# Altium PCB robothreePCB.PcbDoc
Units mm, origin at the board's own origin, x right, y up, seen from the top; angles counter-clockwise.
Board outline 40 x 50 mm, 4 copper layers (Top Layer, Int1 (GND), Int2 (PWR), Bottom Layer), stack 1.369 mm thick; 67 components, 57 nets, 274 pads, 149 vias.
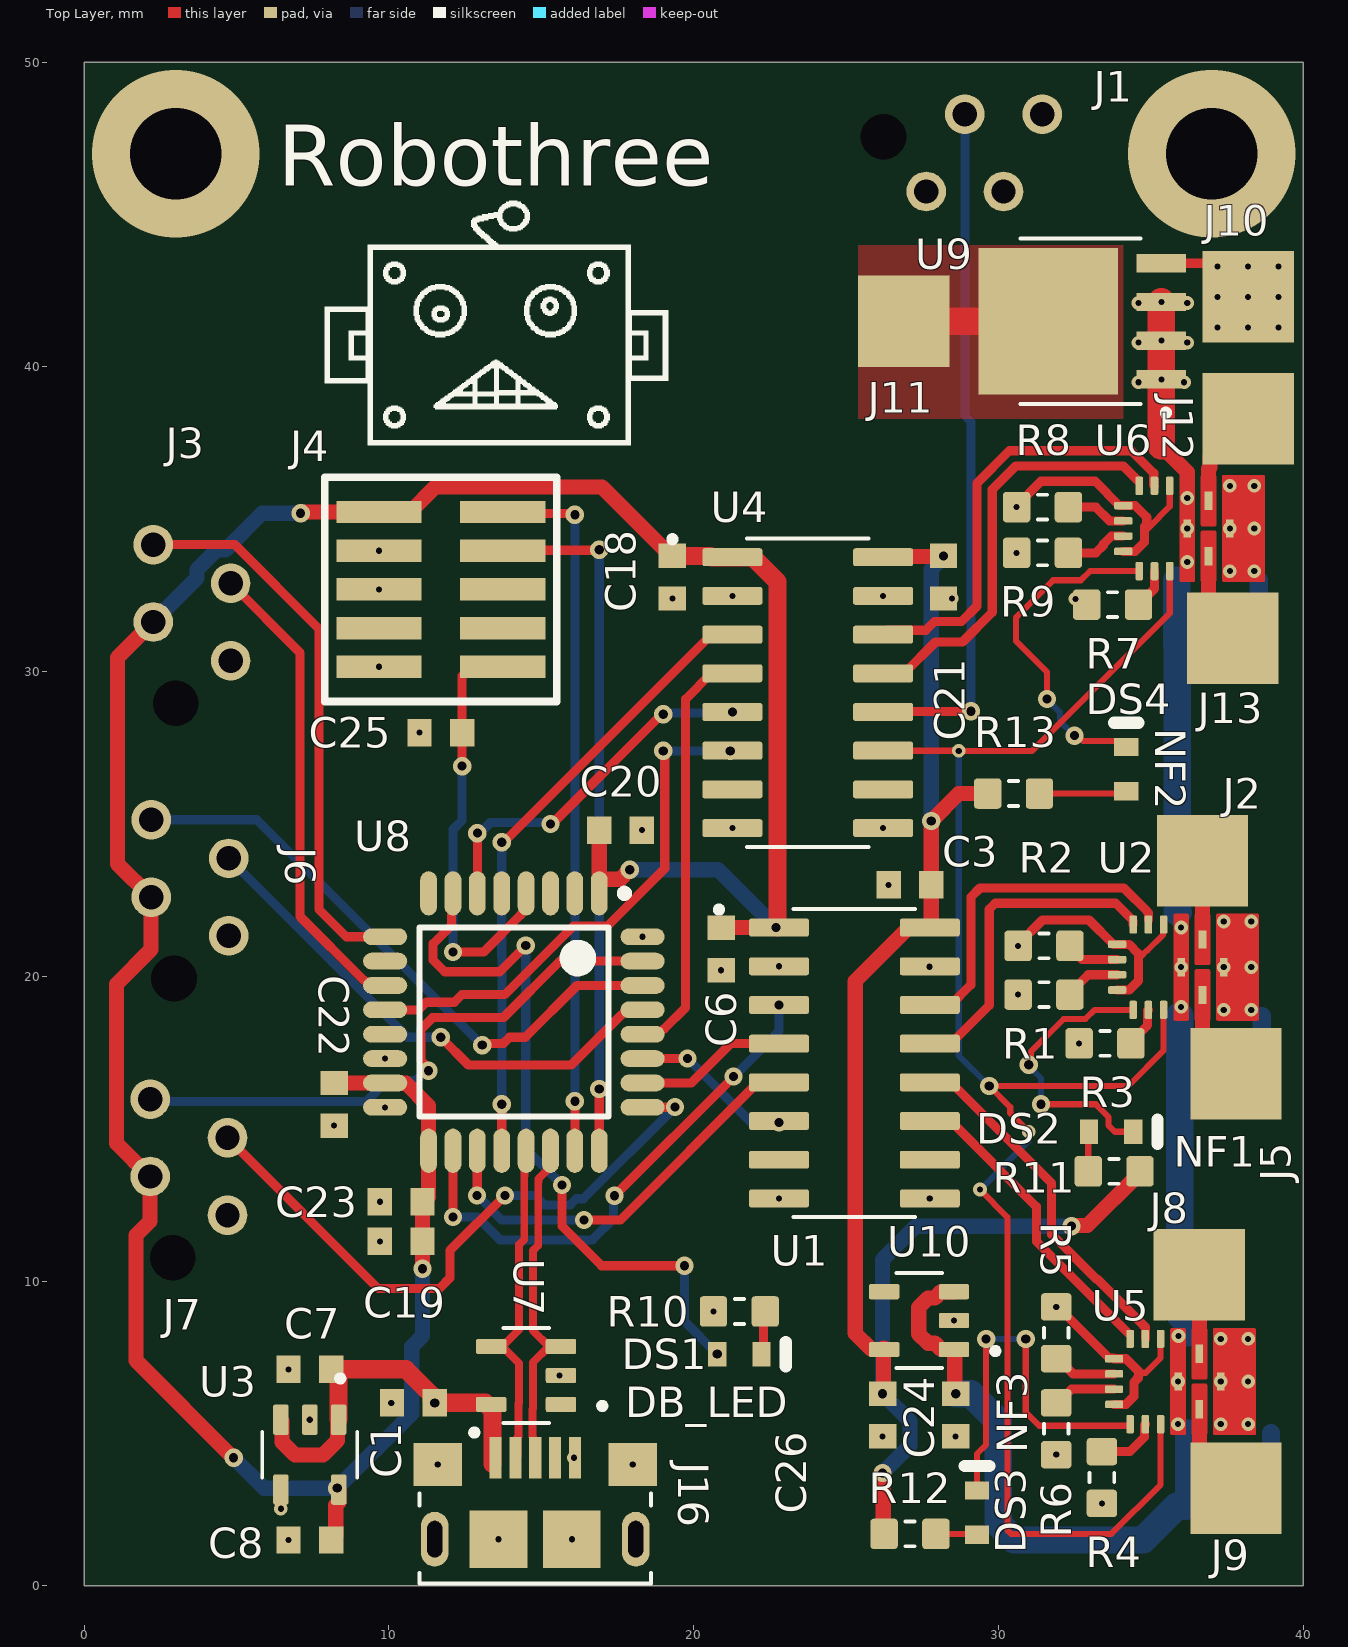
[diagram p0: Top Layer view]
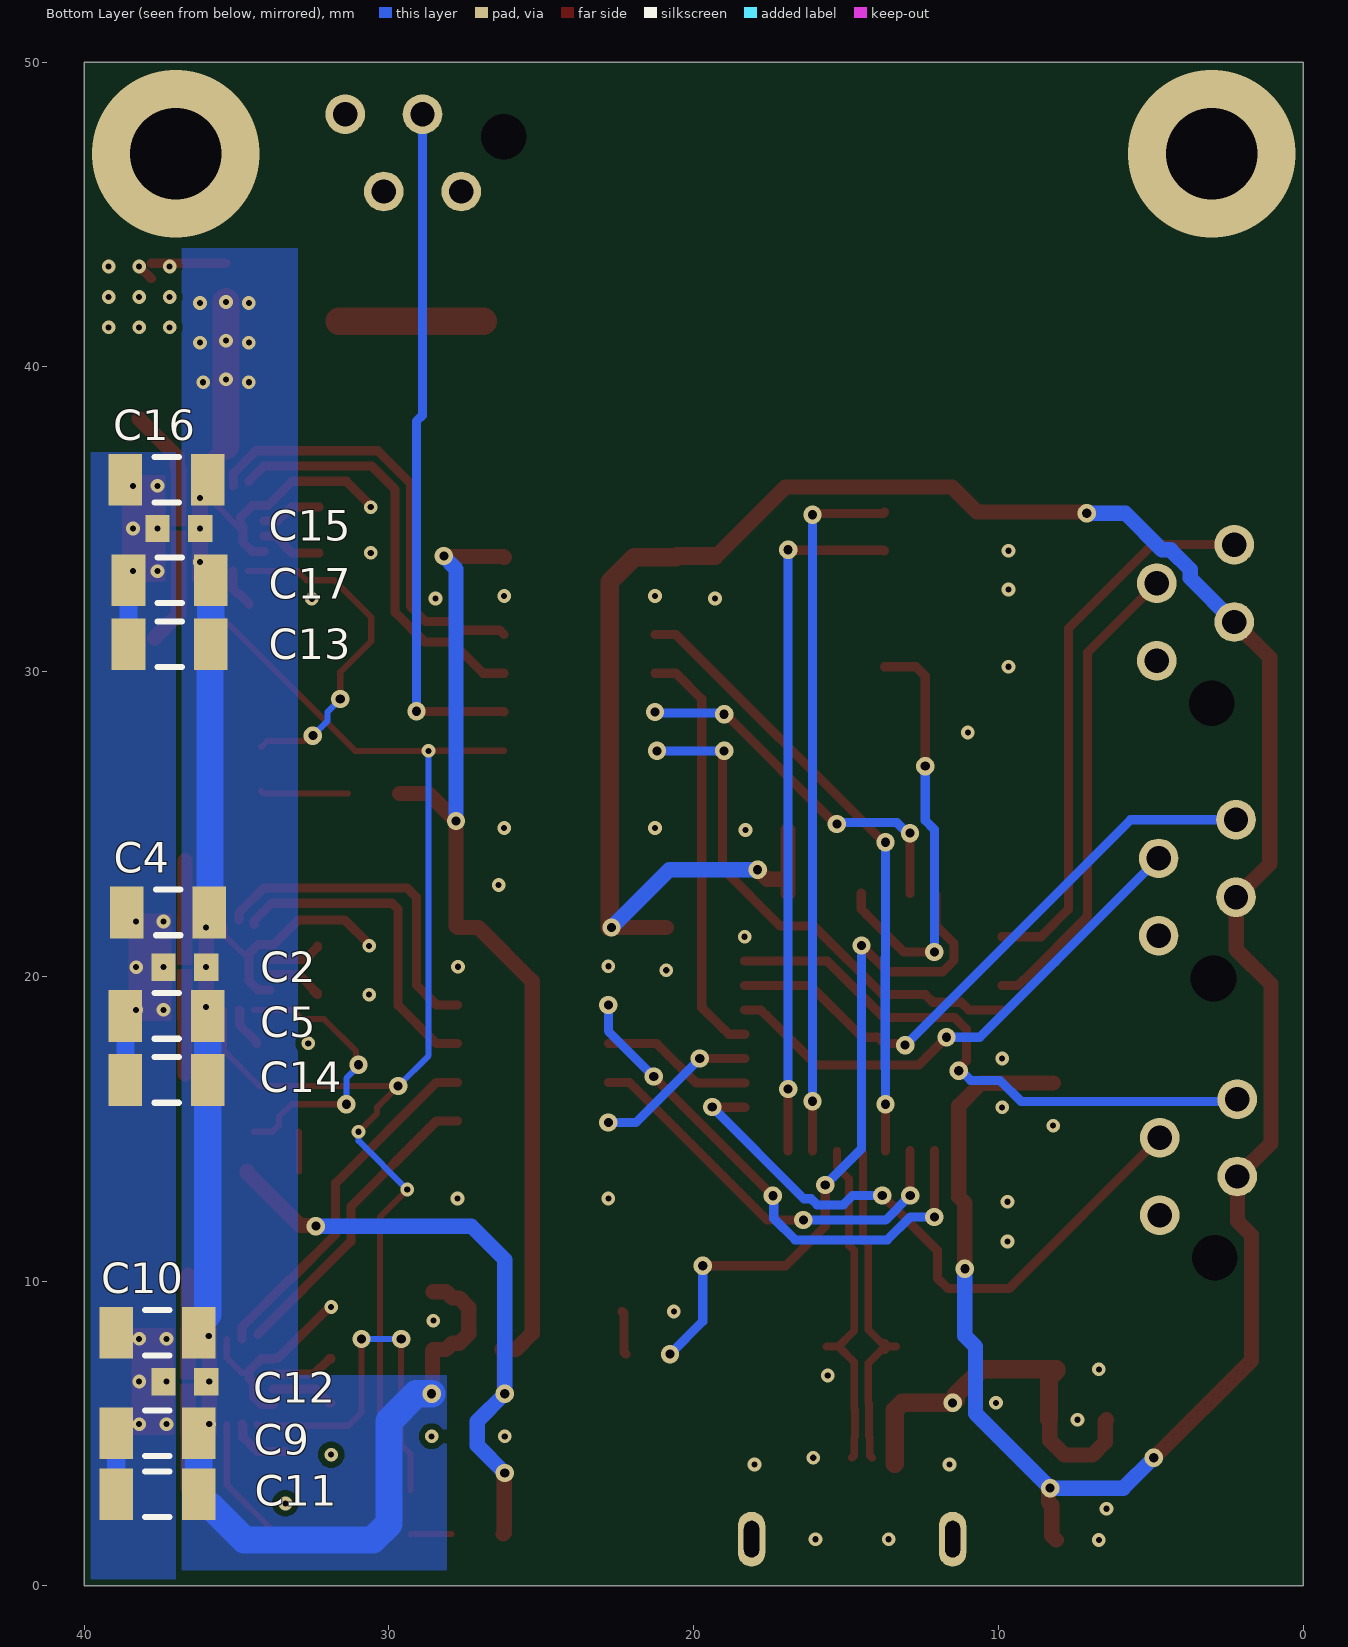
[diagram p1: Bottom Layer view, seen from below]
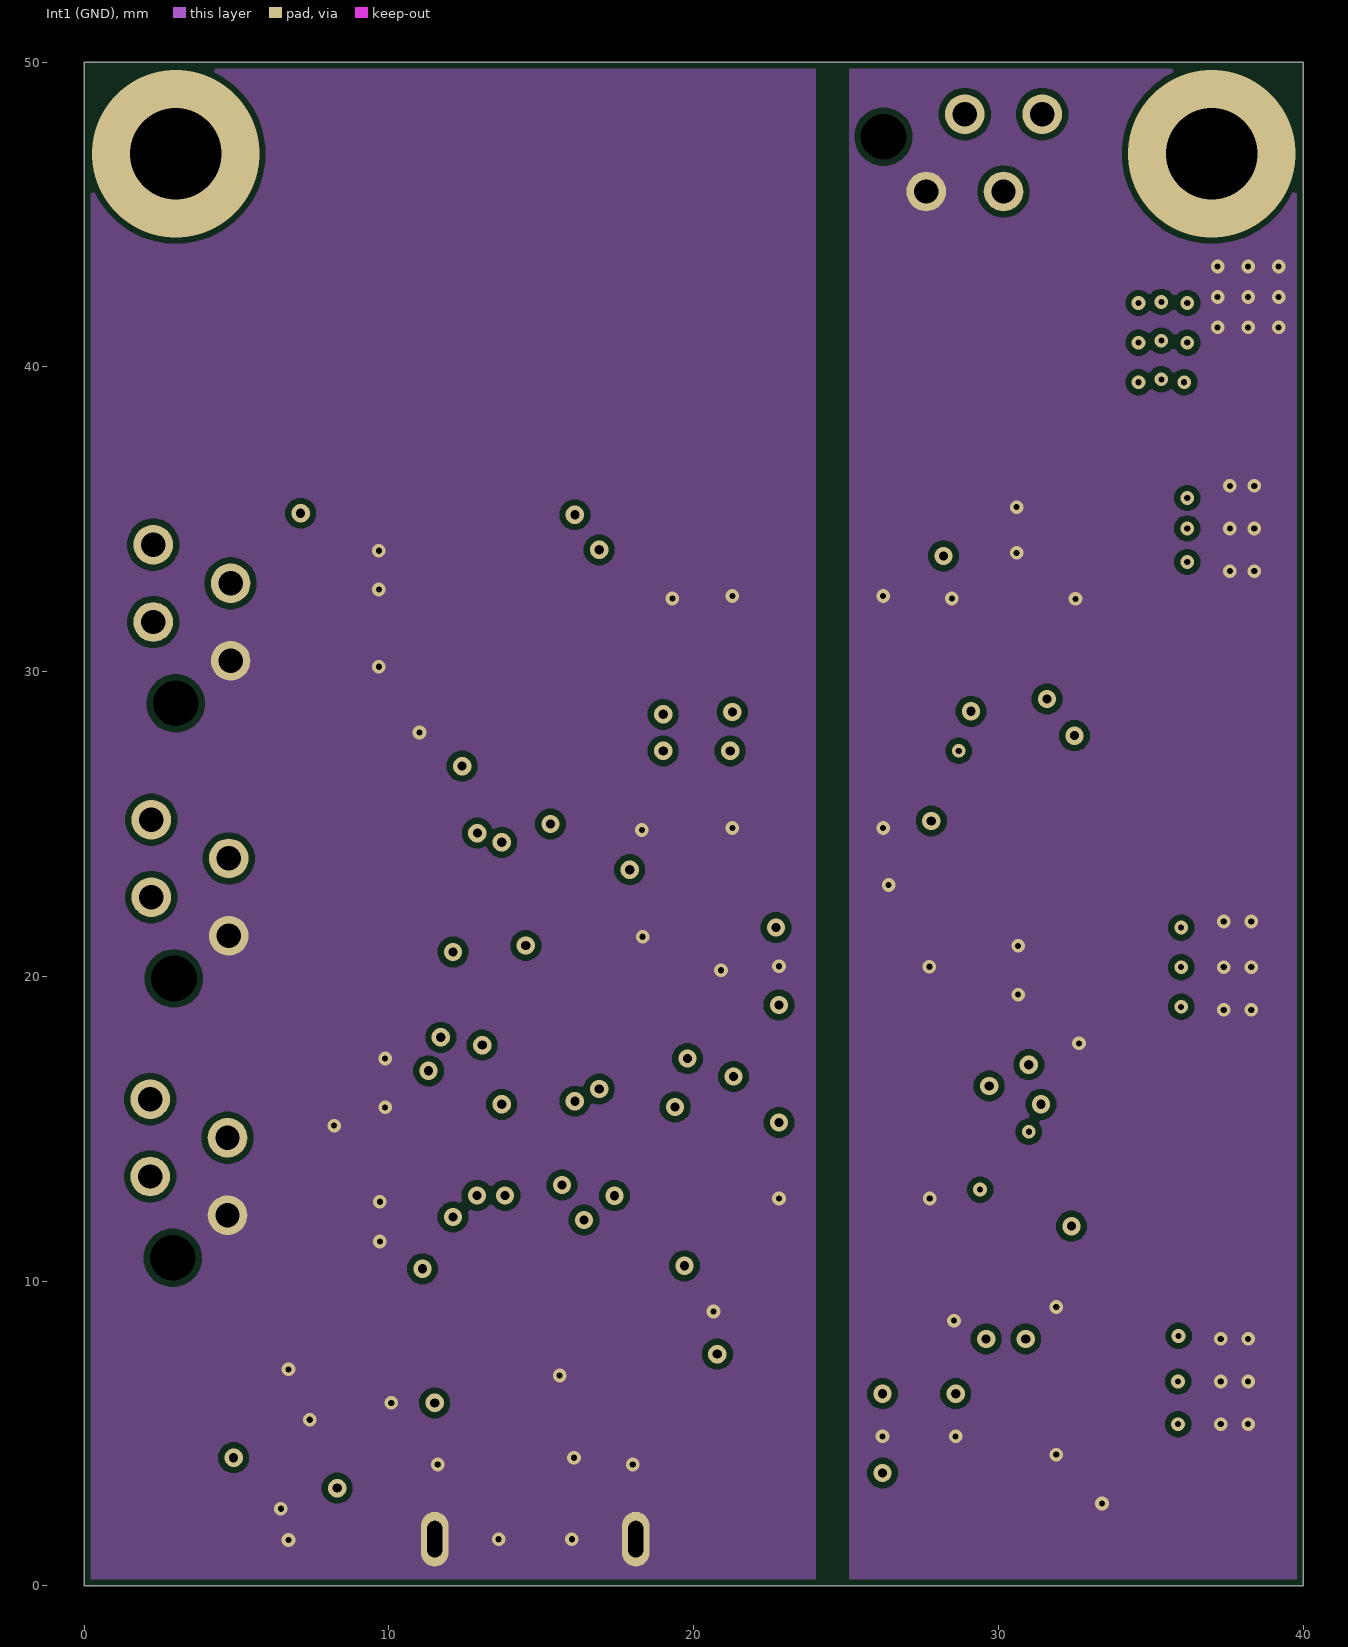
[diagram p2: Int1 (GND)]
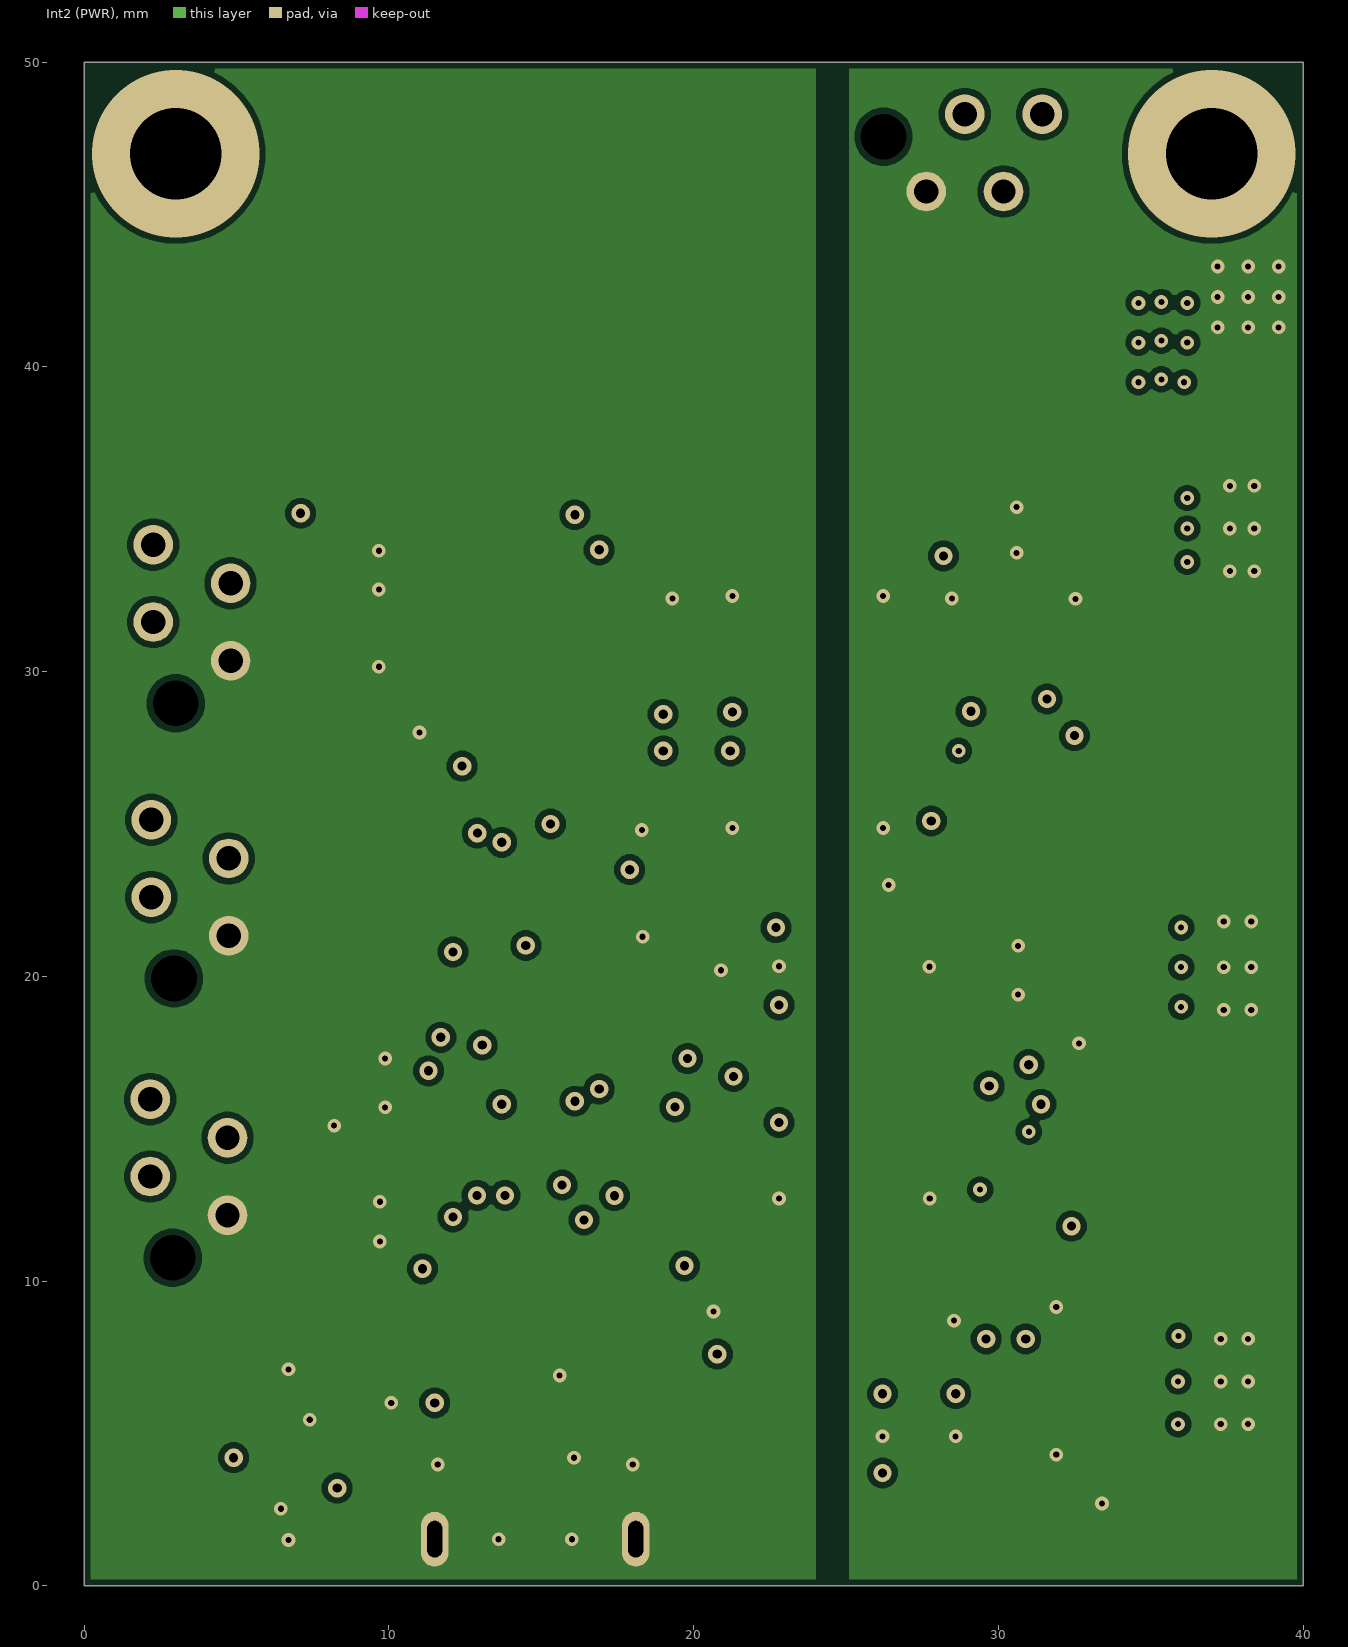
[diagram p3: Int2 (PWR)]
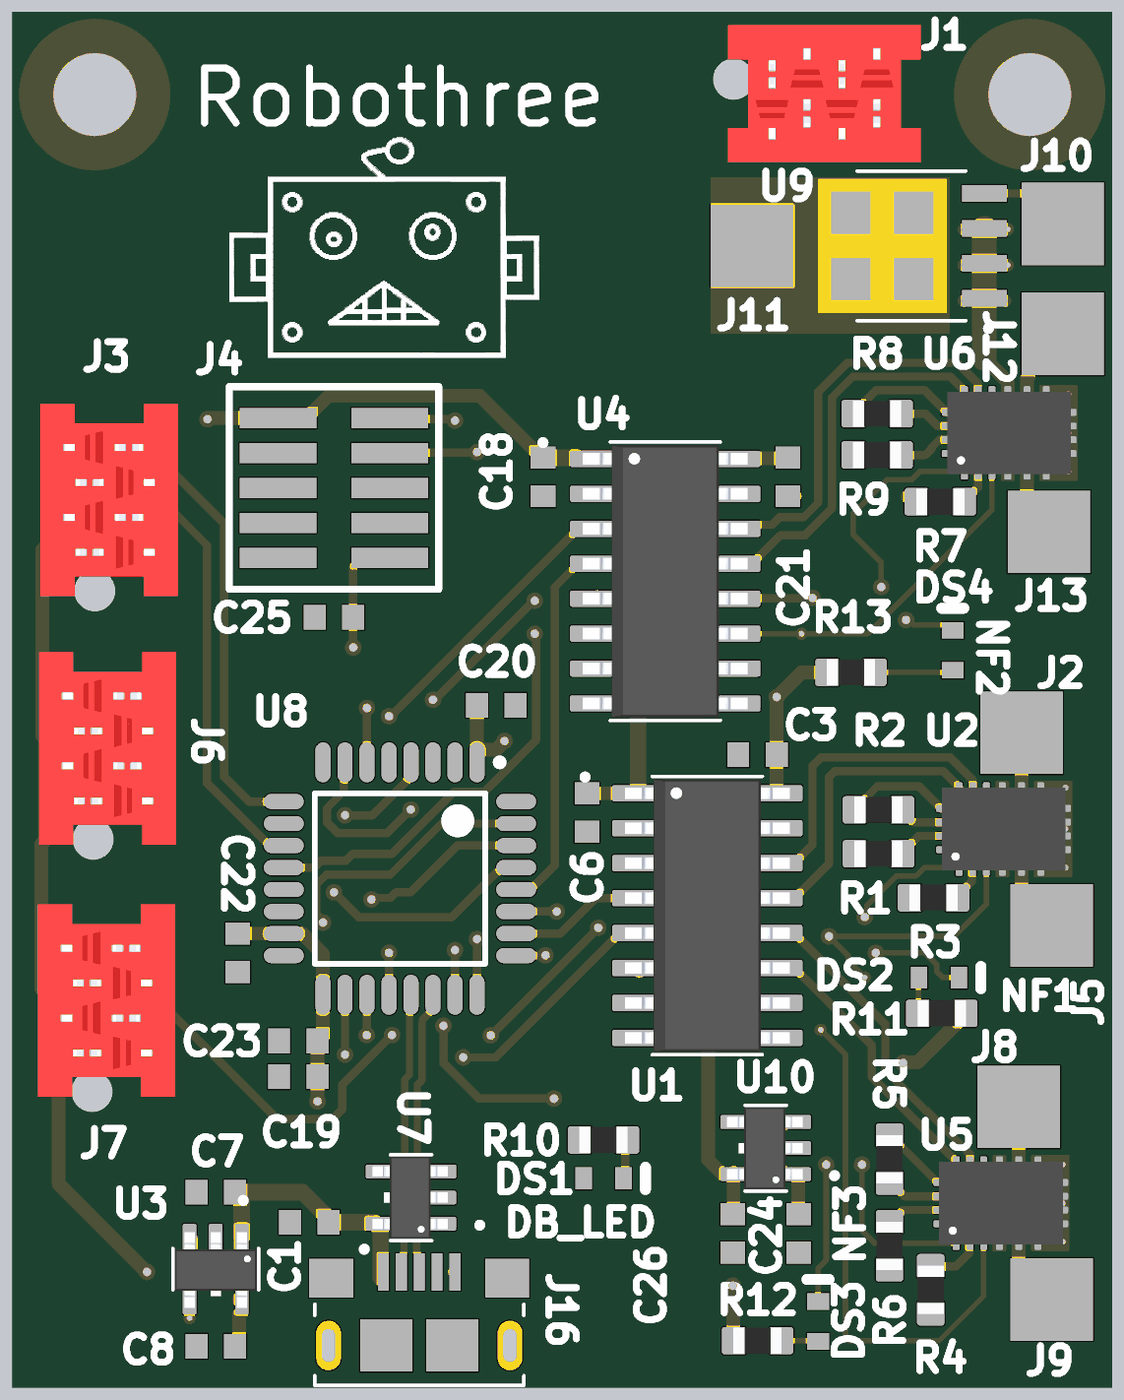
[diagram p4: 3D render of the assembled board from above, using the file's embedded part models]

## Layer stack, top to bottom
Top Solder: solder mask 0.0254, SM-001, Dk 4
Top Layer: signal copper 0.035
Dielectric 1: prepreg 0.1295, PP-017, Dk 4.3
Dielectric 2: prepreg 0.1295, PP-017, Dk 4.3
Int1 (GND): signal copper 0.035
Dielectric 3: core 0.7112, Core-039, Dk 4.8
Int2 (PWR): signal copper 0.035
Dielectric 4: prepreg 0.1295, PP-017, Dk 4.3
Dielectric 5: prepreg 0.1295, PP-017, Dk 4.3
Bottom Layer: signal copper 0.035
Bottom Solder: solder mask 0.0254, SM-001, Dk 4

## Board outline
0,0 0,50 40,50 40,0

## Design rules (kind name [scope] priority, off if disabled: settings)
BoardOutlineClearance [All] p1: gap=0.2 ignorepadtopadclearanceinfootprint=FALSE except(0: Arc-SplitContinuation Track-SplitContinuation SMDPad-SplitContinuation THPad-SplitContinuation Via-SplitContinuation Fill-SplitContinuation Poly-SplitContinuation Region-SplitContinuation Text-SplitContinuation)
Clearance [All] p1: gap=0.2 ignorepadtopadclearanceinfootprint=TRUE except(0: Arc-Hole Track-Hole SMDPad-Hole THPad-Hole Via-Hole Fill-Hole Poly-Hole Region-Hole Text-Hole; 0.14: Poly-Poly Poly-Region Region-Region)
ComponentClearance [All] p1: gap=0.2 collisioncheckmode=3 verticalgap=0.2 showdistances=FALSE
DiffPairsRouting DiffPairsRouting_DIFF90 [InDifferentialPairClass('DIFF90')] p1: maxlimit=0.254 minlimit=0.2 mostfreqgap=0.2 toplayer_minwidth=0.26 toplayer_maxwidth=0.26 toplayer_prefwidth=0.26 midlayer1_minwidth=0.26 midlayer1_maxwidth=0.26 midlayer1_prefwidth=0.26 midlayer2_minwidth=0.26 midlayer2_maxwidth=0.26 midlayer2_prefwidth=0.26 bottomlayer_minwidth=0.26 bottomlayer_maxwidth=0.26 bottomlayer_prefwidth=0.26 maxuncoupledlength=12.7
DiffPairsRouting [All] p2: maxlimit=0.254 minlimit=0.254 mostfreqgap=0.254 toplayer_minwidth=0.381 toplayer_maxwidth=0.381 toplayer_prefwidth=0.381 midlayer1_minwidth=0.381 midlayer1_maxwidth=0.381 midlayer1_prefwidth=0.381 midlayer2_minwidth=0.381 midlayer2_maxwidth=0.381 midlayer2_prefwidth=0.381 bottomlayer_minwidth=0.381 bottomlayer_maxwidth=0.381 bottomlayer_prefwidth=0.381 maxuncoupledlength=12.7
HoleSize [All] p1: absolutevalues=TRUE maxlimit=6.3 minlimit=0.2 maxpercent=80.000 minpercent=20.000
HoleToHoleClearance [All] p1: gap=0.5 allowstackedmicrovias=TRUE
MinimumSolderMaskSliver [All] p1: minsoldermaskwidth=0.2
PlaneClearance [All] p1: clearance=0.2
PlaneConnect [All] p1: planeconnectstyle=Direct reliefexpansion=0.508 reliefentries=4 reliefconductorwidth=0.254 reliefairgap=0.254
PolygonConnect [All] p1: connectstyle=Direct reliefconductorwidth=0.254 reliefentries=4 polygonreliefangle="90 Angle" airgapwidth=0.254
RoutingVias [All] p1: holewidth=0.3 width=0.6 viastyle="Through Hole" minholewidth=0.2 minwidth=0.45 maxholewidth=6.3 maxwidth=10
SilkToSilkClearance [All] p1: silktosilkclearance=0.2
SilkToSolderMaskClearance [IsPad] p1: minsilkscreentomaskgap=0.15 clearancetoexposedcopper=TRUE
SolderMaskExpansion SolderMaskExpansionVIA [isVia] p1: expansion=0.05 istentingtop=TRUE
SolderMaskExpansion [All] p2: expansion=0.05 istentingtop=FALSE
Width [All] p1: maxlimit=5 minlimit=0.2 preferedwidth=0.3
21 further rules are at their usual default settings.

## Classes and differential pairs
differential pair class DIFF90: USB_DATA
differential pair USB_DATA: +USB_DATA_P -USB_DATA_N

## Components (designator, comment, footprint, x,y, rotation, side; value= is the part's Value field where it differs from the comment)
C1 "Cap Semi" 1608[0603] 10.8,6 r0 top value=100nF
C2 "Cap Semi" 1608[0603] 36.7,20.3 r180 bottom value=100nF
C3 "Cap Semi" 1608[0603] 27.1,23 r0 top value=0.1uF
C4 "Cap Semi" C1206 37.25,22.1 r180 bottom value=10uF
C5 "Cap Semi" C1206 37.3,18.7 r180 bottom value=10uF
C6 "Cap Semi" 1608[0603] 20.9,20.9 r90 top value=1uF
C7 "Cap Semi" 1608[0603] 7.4,7.1 r180 top value=1uF
C8 "Cap Semi" 1608[0603] 7.4,1.5 r180 top value=100nF
C9 "Cap Semi" C1206 37.6,5 r180 bottom value=10uF
C10 "Cap Semi" C1206 37.6,8.3 r180 bottom value=10uF
C11 "Cap Semi" C1206 37.6,3 r180 bottom value=10uF
C12 "Cap Semi" 1608[0603] 36.7,6.7 r180 bottom value=100nF
C13 "Cap Semi" C1206 37.2,30.9 r180 bottom value=10uF
C14 "Cap Semi" C1206 37.3,16.6 r180 bottom value=10uF
C15 "Cap Semi" 1608[0603] 36.9,34.7 r180 bottom value=100nF
C16 "Cap Semi" C1206 37.3,36.3 r180 bottom value=10uF
C17 "Cap Semi" C1206 37.2,33 r180 bottom value=10uF
C18 "Cap Semi" 1608[0603] 19.3,33.1 r270 top value=100nF
C19 "Cap Semi" 1608[0603] 10.4,11.3 r0 top value=4.7uF
C20 "Cap Semi" 1608[0603] 17.6,24.8 r180 top value=0.1uF
C21 "Cap Semi" 1608[0603] 28.2,33.1 r90 top value=0.1uF
C22 "Cap Semi" 1608[0603] 8.2,15.8 r90 top value=0.1uF
C23 "Cap Semi" 1608[0603] 10.4,12.6 r0 top value=0.1uF
C24 "Cap Semi" 1608[0603] 28.6,5.6 r270 top value=1uF
C25 "Cap Semi" 1608[0603] 11.7,28 r180 top value=100nF
C26 "Cap Semi" 1608[0603] 26.2,5.6 r90 top value=1uF
DS1 "TLMS1000-GS08" VISH-TLMS1000_V 21.5,7.6 r0 top
DS2 "TLMS1000-GS08" VISH-TLMS1000_V 33.7,14.9 r0 top
DS3 "TLMS1000-GS08" VISH-TLMS1000_V 29.3,2.4 r90 top
DS4 "TLMS1000-GS08" VISH-TLMS1000_V 34.2,26.8 r90 top
J1 "215079-4" MICRO-MATCH-FOB-04 27.63,45.76 r180 top
J2 "Motor Pad" motorPads 36.7,23.8 r0 top
J3 "215079-4" MICRO-MATCH-FOB-04 4.8,30.36 r270 top
J4 "FTSH-105-01-XXX-DV-K" FTSH-105-01-XXX-DV-K 11.7,32.7 r270 top
J5 "Motor Pad" motorPads 37.8,16.8 r0 top
J6 "215079-4" MICRO-MATCH-FOB-04 4.74,21.33 r270 top
J7 "215079-4" MICRO-MATCH-FOB-04 4.7,12.16 r270 top
J8 "Motor Pad" motorPads 36.6,10.2 r0 top
J9 "Motor Pad" motorPads 37.8,3.2 r0 top
J10 "Bat-" motorPads 38.2,42.3 r270 top
J11 "Bat+" motorPads 26.9,41.5 r270 top
J12 "Motor Pad" motorPads 38.2,38.3 r0 top
J13 "Motor Pad" motorPads 37.7,31.1 r0 top
J16 "10118193-0001LF" FCI_10118193-0001LF 14.8,1.525 r0 top
R1 "Thick Film" RESC1608X55N 31.5,19.4 r0 top value=100K
R2 "Thick Film" RESC1608X55N 31.5,21 r0 top value=100K
R3 "Thick Film" RESC1608X55N 33.5,17.8 r180 top value=2K2
R4 "Thick Film" RESC1608X55N 33.4,3.55 r270 top value=2K2
R5 "Thick Film" RESC1608X55N 31.9,8.3 r270 top value=100K
R6 "Thick Film" RESC1608X55N 31.9,5.15 r90 top value=100K
R7 "Thick Film" RESC1608X55N 33.75,32.2 r180 top value=2K2
R8 "Thick Film" RESC1608X55N 31.45,35.4 r0 top value=100K
R9 "Thick Film" RESC1608X55N 31.45,33.9 r0 top value=100K
R10 "Thick Film" RESC1608X55N 21.5,9 r180 top value=4K7
R11 "Thick Film" RESC1608X55N 33.8,13.6 r0 top value=4K7
R12 "Thick Film" RESC1608X55N 27.1,1.7 r180 top value=4K7
R13 "Thick Film" RESC1608X55N 30.5,26 r180 top value=4K7
U1 "MAX14930" SOIC127P600X175-16N 25.275,17.155 r0 top
U2 "DRV8243HRXYQ1" DRV8243_VQFN-HR_14 36.05,20.3 r90 top
U3 "NCP164" SOT95P275X110-5N 7.4,4.301 r270 top
U4 "MAX14930" SOIC127P600X175-16N 23.745,29.311 r0 top
U5 "DRV8243HRXYQ1" DRV8243_VQFN-HR_14 35.95,6.7 r90 top
U6 "DRV8243HRXYQ1" DRV8243_VQFN-HR_14 36.25,34.7 r90 top
U7 "CM1223-02SO" SOT95P275X110-5N 14.5,6.9 r180 top
U8 "STM32G441KB" TQFP80P900X900X160-32N 14.1,18.5 r270 top
U9 "BUK6Y10" TO127P600X120-5N 32.7,41.5 r90 top
U10 "NCV8730" SOT95P275X110-5N 27.4,8.7 r180 top

## Footprints (in the part's own frame and the unit in brackets; to place one, negate y for a bottom-side part, rotate by r counter-clockwise, add the part's x,y. Pads: shape width x height; smd on the part's side, far side on the other; paste and mask are expansions set on the pad)
1608[0603] [mm] "Chip Capacitor, Body 1.6x0.8mm, IPC High Density"
  rect 0.8x0.9 smd: 1(-0.7,0) 2(0.7,0)
  body extent -0.87,-0.48 0.87,0.48, height 1.3
C1206 [mm] "Chip Capacitor, Body 3.2x1.6mm, IPC High Density"
  rect 1.1x1.7 smd: 1(-1.35,0) 2(1.35,0)
  silkscreen extent -0.4,-0.75 0.4,0.75, body extent -1.7,-0.9 1.7,0.9, height 1.3
DRV8243_VQFN-HR_14 [mm]
  rrect40% 0.6x0.25 smd paste+0 mask+0.05: 1(-1.4,1.625) 2(-1.4,1.125) 3(-1.4,0.625) 8(1.4,0.625) 9(1.4,1.125) 10(1.4,1.625)
  rect 0.6x0.25 smd paste-2539.97 mask+0: 4(0,0.05) 5(-0.912,-0.65) 6(0,-1.35) 7(0.912,-0.65)
  rrect40% 0.25x0.6 smd paste+0 mask+0.05: 11(0.75,2.15) 12(0.25,2.15) 13(-0.25,2.15) 14(-0.75,2.15)
  Top Layer region: 0.124,-0.4 1.7,-0.4 1.719,-0.404 1.735,-0.415 1.746,-0.431 1.749,-0.45 1.749,-0.449 1.749,-0.851 1.743,-0.875 1.725,-0.893 1.7,-0.9 1.7,-0.9 0.124,-0.9 0.105,-0.896 0.089,-0.886 0.078,-0.869 0.075,-0.851 0.075,-0.85 0.075,-0.45 0.081,-0.425 0.099,-0.407 0.124,-0.4
  Top Layer region: -1.7,-1.1 1.7,-1.1 1.719,-1.104 1.735,-1.115 1.746,-1.131 1.75,-1.15 1.75,-1.15 1.75,-2.45 1.746,-2.469 1.735,-2.485 1.719,-2.496 1.7,-2.5 1.7,-2.5 -1.7,-2.5 -1.719,-2.496 -1.735,-2.485 -1.746,-2.469 -1.75,-2.45 -1.75,-2.45 -1.75,-1.15 -1.746,-1.131 -1.735,-1.115 -1.719,-1.104 -1.7,-1.1
  Top Layer region: -1.7,-0.4 -0.125,-0.4 -0.106,-0.404 -0.089,-0.415 -0.078,-0.431 -0.075,-0.451 -0.075,-0.45 -0.075,-0.85 -0.078,-0.869 -0.089,-0.885 -0.106,-0.896 -0.125,-0.9 -0.125,-0.9 -1.7,-0.9 -1.719,-0.896 -1.735,-0.886 -1.746,-0.869 -1.75,-0.851 -1.75,-0.85 -1.75,-0.45 -1.743,-0.425 -1.725,-0.407 -1.7,-0.4
  Top Layer region: -1.7,0.3 1.7,0.3 1.719,0.296 1.735,0.285 1.746,0.269 1.75,0.25 1.75,0.25 1.75,-0.15 1.746,-0.169 1.735,-0.185 1.719,-0.196 1.7,-0.2 1.7,-0.2 -1.7,-0.2 -1.719,-0.196 -1.735,-0.185 -1.746,-0.169 -1.75,-0.15 -1.75,-0.15 -1.75,0.25 -1.746,0.269 -1.735,0.285 -1.719,0.296 -1.7,0.3
  body extent -1.5,-2.25 1.5,2.25, height 1
FCI_10118193-0001LF [mm]
  rect 0.4x1.35 smd: 1(-1.3,2.675) 2(-0.65,2.675) 3(0,2.675) 4(0.65,2.675) 5(1.3,2.675)
  rect 1.6x1.4 smd: S1(-3.2,2.45) S2(3.2,2.45)
  rect 1.9x1.9 smd: S3(1.2,0) S4(-1.2,0)
  oval 0.9x1.8 hole 0.5 slot 1.2 at 90 deg: S5(-3.3,0) S6(3.3,0)
  silkscreen extent -3.8,-1.45 3.8,3.6
FTSH-105-01-XXX-DV-K [mil]
  rect 29x110 smd mask+2: 1(-100,-80) 2(-100,80) 3(-50,-80) 4(-50,80) 5(0,-80) 6(0,80) 7(50,-80) 8(50,80) 9(100,-80) 10(100,80)
  silkscreen extent -145,-150 145,150
MICRO-MATCH-FOB-04 [mm]
  round 1.3 hole 0.8: 1(0,0) 2(-1.27,-2.54) 3(-2.54,0) 4(-3.81,-2.54)
  round 0 hole 1.5 unplated: drill(1.4,-1.8)
  body extent -5.41,-3.77 1.6,1.23, height 4
motorPads [mm]
  rect 3x3 smd: 1(0,0)
RESC1608X55N [mm] "Chip Resistor, Body 1.6x0.8mm, EIA 0603, IPC Medium Density"
  round 0.254 on Mech15: 0(0,0)
  rrect25% 0.9x1 smd: 1(-0.85,0) 2(0.85,0)
  Top Layer pour cut-out: -0.6,0.5 -0.4,0.7 0.4,0.7 0.6,0.5 0.6,-0.5 0.4,-0.7 -0.4,-0.7 -0.6,-0.5
  silkscreen extent -0.15,-0.41 0.15,0.41, body extent -0.87,-0.47 0.88,0.48, height 0.54
SOIC127P600X175-16N [mm]
  rrect25% 1.97x0.59 smd: 1(-2.475,4.445) 2(-2.475,3.175) 3(-2.475,1.905) 4(-2.475,0.635) 5(-2.475,-0.635) 6(-2.475,-1.905) 7(-2.475,-3.175) 8(-2.475,-4.445) 9(2.475,-4.445) 10(2.475,-3.175) 11(2.475,-1.905) 12(2.475,-0.635) 13(2.475,0.635) 14(2.475,1.905) 15(2.475,3.175) 16(2.475,4.445)
  silkscreen extent -4.54,-5.06 2,5.13, body extent -3,-4.95 3,4.95, height 1.75
SOT95P275X110-5N [mm]
  rrect25% 1x0.5 smd: 1(-1.145,0.95) 2(-1.145,0) 3(-1.145,-0.95) 4(1.145,-0.95) 5(1.145,0.95)
  silkscreen extent -2.6,-1.56 0.75,1.56, body extent -1.34,-1.5 1.41,1.5, height 1.1
TO127P600X120-5N [mm]
  rect 0.6x1.62 smd: 1(-1.905,-2.65) 2(-0.635,-2.65) 3(0.635,-2.65) 4(1.905,-2.65)
  rect 4.8x4.58 smd paste-3: 5(0,1.06)
  silkscreen extent -3.1,-2.9 2.72,1.97
TQFP80P900X900X160-32N [mm] "TQFP, 32-Leads, Body 7,00x7,00mm, Pitch 0,80mm, IPC Medium Density"
  oval 1.45x0.55 smd: 1(-4.225,2.8) 2(-4.225,2) 3(-4.225,1.2) 4(-4.225,0.4) 5(-4.225,-0.4) 6(-4.225,-1.2) 7(-4.225,-2) 8(-4.225,-2.8) 17(4.225,-2.8) 18(4.225,-2) 19(4.225,-1.2) 20(4.225,-0.4) 21(4.225,0.4) 22(4.225,1.2) 23(4.225,2) 24(4.225,2.8)
  oval 0.55x1.45 smd: 9(-2.8,-4.225) 10(-2,-4.225) 11(-1.2,-4.225) 12(-0.4,-4.225) 13(0.4,-4.225) 14(1.2,-4.225) 15(2,-4.225) 16(2.8,-4.225) 25(2.8,4.225) 26(2,4.225) 27(1.2,4.225) 28(0.4,4.225) 29(-0.4,4.225) 30(-1.2,4.225) 31(-2,4.225) 32(-2.8,4.225)
  silkscreen extent -4.35,-3.1 3.1,3.75, body extent -4.5,-4.5 4.5,4.5, height 1.6
VISH-TLMS1000_V [mm] "SMD, 2-Leads, Body 0.8x1.6mm"
  rect 0.6x0.8 smd: 1(-0.725,0) 2(0.725,0)
  silkscreen extent 1.52,-0.4 1.52,0.4, body extent -0.8,-0.4 0.8,0.4, height 0.65

## Part data
C1 C2 C3 C4 C5 C6 C7 C8 C9 C10 C11 C12 C13 C14 C15 C16 C17 C18 C19 C20 C21 C22 C23 C24 C25 C26: "Capacitor (Semiconductor SIM Model)", LatestRevisionDate=29-May-2009, LatestRevisionNote="IPC-7351 Footprint Added.", PackageDescription="Chip Capacitor", PackageReference=C1206, Published=8-Jun-2000, Publisher="Altium Limited"
DS1 DS2 DS3 DS4: library part CMP-2000-07254-1, "Low Current LED, 40 mW, 1.8 V, -40 to 100 degC, 2-Pin SMD (0603), RoHS, Tape and Reel", Forward Current If=2mA, Forward Voltage=1.8V, LED Colour=Red, MANUFACTURER=Vishay, Package Description="2-Pin Surface Mount Device, Body 1.6 x 0.8 mm", Package Reference=TLMS1000, Automotive Qualification Standard=AEC-Q100, Bulb Size=1.6mmx0.8mm, Datasheet URL=https://datasheet.ciiva.com/5798/1698881-5798337.pdf, Datasheet Version="Rev. 1.7, 02/2011", LED Mounting=SMD, Lens Shape=Rectangular, Luminous Intensity=4mcd, Manufacturer URL=http://www.vishay.com/, Mounting Technology=SurfaceMount, MSL=MSL2-1year, Packaging=CutTape, Product Range=-, SVHC=ToBeAdvised, Viewing Angle=80°, Wavelength Typ=636nm
J1 J3 J6 J7: "Micro-MaTch 215079-4"
J2 J5 J8 J9 J12 J13: "Motor pad"
J4: "TERMINAL STRIP, .050\"(1.27mm) PITCH, 10 PINS, KEYED", MANUFACTURER=SAMTEC, CREATED="November 30, 2016 - Wendy Xin", PCB DECAL=FTSH-105-01-XXX-DV-K
J10 J11: library part Bat, "Batteryterminal"
J16: "USB - micro B USB 2.0 Receptacle Connector 5 Position Surface Mount, Right Angle; Through Hole", Package=None, Availability=Unavailable, MF="Amphenol ICC", MP=10118193-0001LF, Price=None, SnapEDA_Link=https://www.snapeda.com/parts/10118193-0001LF/Amphenol%20FCI/view-part/2758989/?ref=snap
R1 R2 R5 R6 R8 R9: library part RES_100K_0603_1%, "Resistor SMD chip 100k Ohm 0.1W 1% 0603", Manufacturer 1=Vishay/Dale, Manufacturer Part Number 1=CRCW0603100KFKEA, Package / Case="0603 (2012 metric)", Ratings=1/10W, Supplier Part Number 1=541-100KHCT-ND, Tolerance=±1%, SCDType=spec, Supplier 1=Digi-Key
R3 R4 R7: library part RES_2K2_0603_5%, "Resistor SMD chip 2.2k Ohm 0.1W 5% 0603", Manufacturer 1=Yageo, Manufacturer 2="Samsung Electro-Mechanics America, Inc", Manufacturer 3="Stackpole Electronics Inc", Manufacturer 4="Rohm Semiconductor", Manufacturer 5="Panasonic Electronic Components", Manufacturer Part Number 1=RC0603JR-072K2L, Manufacturer Part Number 2=RC1608J222CS, Manufacturer Part Number 3=RMCF0603JT2K20, Manufacturer Part Number 4=MCR03ERTJ222, Manufacturer Part Number 5=ERJ-3GEYJ222V, Package / Case="0603 (1608 metric)", Ratings="1/10 W", Supplier Part Number 1=311-2.2KGRDKR-ND, Temperature Coefficient=±100ppm/°C, Tolerance=±5%, ComponentLink1Description=http://www.yageo.com/documents/recent/PYu-RC0603_51_RoHS_L_4.pdf, ComponentLink1URL=http://www.yageo.com/documents/recent/PYu-RC0603_51_RoHS_L_4.pdf, ComponentLink2Description=http://www.samsungsem.com/servlet/FileDownload?filename=productcatalog/pdf/Chip_Resistor.pdf, ComponentLink2URL=http://www.samsungsem.com/servlet/FileDownload?filename=productcatalog/pdf/Chip_Resistor.pdf, ComponentLink3Description=http://www.seielect.com/Catalog/SEI-RMCF_RMCP.pdf, ComponentLink3URL=http://www.seielect.com/Catalog/SEI-RMCF_RMCP.pdf, ComponentLink4Description=http://rohmfs.rohm.com/en/products/databook/datasheet/passive/resistor/chip_resistor/mcr_g.pdf, ComponentLink4URL=http://rohmfs.rohm.com/en/products/databook/datasheet/passive/resistor/chip_resistor/mcr_g.pdf, ComponentLink5Description=http://industrial.panasonic.com/www-cgi/jvcr13pz.cgi?E+PZ+3+AOA0001+ERJ3GEYJ222V+7+WW, ComponentLink5URL=http://industrial.panasonic.com/www-cgi/jvcr13pz.cgi?E+PZ+3+AOA0001+ERJ3GEYJ222V+7+WW, Material="Thick Film", RoHS 1="RoHS Compliant", RoHS 2="RoHS Compliant", RoHS 3="RoHS Compliant", RoHS 4="RoHS Compliant", RoHS 5="RoHS Compliant", SCDType=spec, Supplier 1=Digi-Key, Supplier 2=Digi-Key, Supplier 3=Digi-Key, Supplier 4=Digi-Key, Supplier 5=Digi-Key, Supplier Part Number 2=1276-5070-6-ND, Supplier Part Number 3=RMCF0603JT2K20DKR-ND, Supplier Part Number 4=RHM2.2KCGDKR-ND, Supplier Part Number 5=P2.2KGDKR-ND
R10 R11 R12 R13: library part RES_4K7_0603_1%, "Resistor SMD chip 4.7K Ohm 0.1W 1% 0603", MANUFACTURER=Yageo, Manufacturer Part Number=RC0603FR-074K7L, Package / Case="0603 (1608 Metric)", Ratings=1/10W, Supplier Part Number 1=311-4.70KHRCT-ND, Tolerance=±1%, SCDType=undef, Supplier 1=Digi-Key
U1 U4: "MAX14930DASE+"
U2 U5 U6: library part DRV8243H-Q1_VQFN-HR_14, "Automotive H-Bridge Driver with Integrated Current Sense and Diagnostics"
U3: "NCP164CSN330T1G"
U7: "CM1223-02SO TVS diode array"
U9: "BUK6Y10-30PX"
U10: "NCV8730ASN500T1G"

## Via types
v1: diameter 0.45, hole 0.2, Top Layer to Bottom Layer, tented both sides, 95 vias
v2: diameter 0.6, hole 0.3, Top Layer to Bottom Layer, tented both sides, 52 vias
v3: diameter 5.5, hole 3, Top Layer to Bottom Layer, tented both sides, 2 vias

## Nets (pads, with @x,y where several pads share a name; then routed paths per layer and width w, separated by ;. In a path a pad name is that pad's centre, name@x,y a point inside that pad or via, vN(x,y) a via of type N, cw(c..) or ccw(c..) an arc to the next point about the centre after c; other vN are vias at no path point)
+3V3: C6.2 C8.1 C18.1 C19.2 C20.2 C22.2 C23.2 J3.2 J4.1 J6.2 J7.2 U1.1 U3.5 U4.1 U8.1 U8.15 U8.17 | length 99.3
  Top Layer w0.5: J7.2@2.145,13.43 1.052,14.523 1.052,19.74 2.192,20.88 J6.2@2.192,22.592 ; J7.2@2.152,13.422 2.152,11.961 1.692,11.501 1.692,7.393 v2@4.885,4.2 ; J6.2@2.185,22.6 1.092,23.693 1.092,30.463 J3.2 ; J3.2@2.252,31.638 J3.2@2.252,31.653 ; v2(7.1,35.2) 7.127,35.2 7.167,35.24 J4.1 10.697,35.24 11.515,36.058 16.992,36.058 19.25,33.8 C18.1 ; C8.1 8.25,1.65 8.25,2.636 8.35,2.736 U3.5 ; C22.2 U8.15 9.885,16.49 10.56,16.49 11.3,15.75 U8.17 11.3,12.756 11.1,12.556 C19.2 v2(11.1,10.4) ; U8.1 U8.1@16.9,23.161 ; C20.2 U8.1@16.9,23.161 ; v2(17.9,23.5) 17.585,23.185 16.923,23.185 U8.1@16.9,23.161 ; C6.2 v2(22.7,21.6)
  Top Layer w0.6: C18.1 20.546,33.8 20.59,33.756 U4.1 21.95,33.756 22.755,32.951 U1.1@22.755,21.605
  Bottom Layer w0.5: J3.2 3.7,33.07 3.7,33.356 4.344,34 4.63,34 5.83,35.2 v2(7.1,35.2) ; v2(4.9,4.2) 5.9,3.2 v2(8.3,3.2) 10.75,5.65 10.75,7.85 11.1,8.2 v2(11.1,10.4) ; v2(17.9,23.5) 20.8,23.5 v2(22.7,21.6)
+5: C1.2 C7.1 J16.1 U3.1 U3.3 U7.5 | length 13.1
  Top Layer w0.5: U3.3 6.49,5.406 6.49,4.71 6.914,4.286 7.834,4.286 8.31,4.762 8.31,5.426 U3.1@8.34,5.456
  Top Layer w0.6: U3.1@8.34,5.456 8.34,6.81 8.1,7.05 C7.1 10.557,7.1 11.4,6.257 11.4,6.1 v2(11.5,6) 13.155,6 13.4,5.755 J16.1@13.4,4
+5vP: C3.2 C21.2 C26.2 R11.2 R12.2 R13.2 U1.16 U4.16 U10.5 | length 53.4
  Top Layer w0.5: v2(26.2,3.7) 26.219,3.681 26.219,1.731 R12.2 ; U4.16 26.242,33.778 28.178,33.778 v2(28.2,33.8) ; C26.2@26.227,6.328 U10.5@26.227,7.74 ; U10.5 26.237,7.75 25.835,7.75 25.3,8.285 25.3,19.84 27.06,21.6 U1.16 27.755,21.6 27.8,21.645 C3.2 v2(27.8,25.1) 28.7,26 R13.2 ; v2(32.4,11.8) 32.419,11.819 32.919,11.819 34.65,13.55 R11.2
  Top Layer w0.6: U10.5@26.227,7.74 U10.5@26.237,7.75
  Bottom Layer w0.5: v2(26.2,3.7) 27.1,4.6 27.1,5.4 v2(26.2,6.3) 26.2,10.7 27.3,11.8 v2(32.4,11.8) ; v2(27.8,25.1) 27.8,33.373 28.2,33.773 v2(28.2,33.8)
+16: C2.2 C4.2 C5.2 C9.2 C10.2 C11.2 C12.2 C13.2 C14.2 C15.2 C16.2 C17.2 C24.1 U2.4 U5.4 U6.4 U9.1 U9.2 U9.3 U10.1 U10.3 | length 47.7
  Top Layer w0.5: U10.3 28.125,9.65 27.915,9.44 27.691,9.44 27.385,9.134 27.385,8.266 27.691,7.96 27.915,7.96 28.125,7.75 U10.1 28.573,7.722 C24.1@28.573,6.328 ; 35.35,37.407 36.2,36.557 v1(36.2,35.7)
  Top Layer w0.9: 35.35,37.407 v1(35.35,39.595) v1(35.35,40.865) v1(35.35,42.135)
  Bottom Layer w0.9: v2(28.6,6.3) 29.1,6.3 30,5.4 30,2.027 30.527,1.5 34.75,1.5 35.85,2.6 36.15,2.6 36.25,2.7 C11.2 C9.2 ; C17.2 C13.2 35.875,30.875 35.875,22.125 C4.2 ; C5.2 C14.2 35.95,8.9 36.25,8.6 C10.2
  other v1: 35.9,5.3 35.9,6.7 35.916,8.197 36,19 36,20.3 36,21.6 36.2,33.6 36.2,34.7 34.6,39.5 36.1,39.5 34.6,40.8 36.2,40.8 34.6,42.1 36.2,42.1
BAT+: J11.1 U9.5 | length 4.7
  Top Layer w0.9: J11.1 U9.5
DB_LED_RED: DS1.1 U8.7 | length 23.6
  Top Layer w0.3: U8.7 12.052,22.677 12.052,21.671 11.45,21.069 11.45,20.531 11.831,20.15 13.631,20.15 v2(14.49,21.01) ; v2(15.681,13.15) 15.681,11.8 16.981,10.5 v2(19.7,10.5)
  Bottom Layer w0.3: v2(14.49,21.01) 14.49,14.34 v2(15.681,13.15) ; v2(19.7,10.5) 19.7,8.675 v2(20.775,7.6)
DRV_nSLEEP: U4.6 U8.12 | length 17.2
  Top Layer w0.3: U8.12 10.974,18.9 11.224,19.15 12.143,19.15 12.393,19.4 13.8,19.4 16.05,21.65 17.159,21.65 19.05,23.541 19.05,25.395 19.05,27.35 v2(19,27.4)
  Bottom Layer w0.3: v2(19,27.4) v2(21.2,27.4)
GND: C1.1 C6.1 C7.2 C8.2 C18.2 C19.1 C20.1 C22.1 C23.1 C25.2 J3.1 J4.3 J4.5 J4.9 J6.1 J7.1 J16.5 J16.S1 J16.S2 J16.S3 J16.S4 J16.S5 J16.S6 R10.2 U1.2 U1.8 U3.2 U3.4 U4.2 U4.8 U7.2 U8.14 U8.16 U8.32
  other v1: 6.7,1.5 13.6,1.525 16,1.525 6.45,2.525 11.6,3.975 18,3.975 16.075,4.2 7.4,5.446 10.075,6 15.6,6.9 6.7,7.1 20.65,9 9.7,11.3 9.7,12.6 22.8,12.71 8.2,15.1 9.875,15.7 9.875,17.3 20.9,20.2 22.8,20.33 18.325,21.3 18.3,24.8 21.27,24.866 11,28 9.668,30.16 19.3,32.4 21.27,32.486 9.668,32.7 9.668,33.97
"MCMot1 D": U1.4 U8.26 | length 5
  Top Layer w0.3: U8.26 19.919,16.5 21.209,17.79 U1.4
MCMot1PWM: U1.3 U8.18 | length 17.3
  Top Layer w0.3: v2(12.1,12.1) U8.18 ; v2(17.4,12.8) v2(21.31,16.71)
  Bottom Layer w0.3: v2(12.1,12.1) 12.893,12.1 13.643,11.35 16.669,11.35 17.369,12.05 17.369,12.769 v2(17.4,12.8) ; v2(21.31,16.71) 22.8,18.2 v2(22.8,19.06)
"MCMot2 D": U1.6 U8.27 | length 5.3
  Top Layer w0.3: U8.27 v2(19.8,17.3)
  Bottom Layer w0.3: v2(19.8,17.3) 21.9,15.2 v2(22.8,15.2)
MCMot2PWM: U1.5 U8.19 | length 13.6
  Top Layer w0.3: v2(12.89,12.81) 12.895,12.814 12.895,14.27 U8.19 ; v2(16.4,12) 17.59,12 22.11,16.52 U1.5
  Bottom Layer w0.3: v2(12.89,12.81) 13.7,12 v2(16.4,12)
"MCMot3 D": U4.4 U8.28 | length 13.8
  Top Layer w0.3: U8.28 18.843,18.1 19.018,18.275 19.034,18.275 19.734,18.976 19.734,29.1 20.58,29.946 U4.4
MCMot3PWM: U4.3 U8.20 | length 20.5
  Top Layer w0.3: U8.20 v2(13.7,15.8) ; v2(13.7,24.4) 13.764,24.4 20.58,31.216 U4.3
  Bottom Layer w0.3: v2(13.7,15.8) 13.7,16.969 13.71,16.979 13.71,20.615 13.7,20.625 v2(13.7,24.4)
MCThwPWM: U4.5 U8.6 | length 12
  Top Layer w0.3: U8.6 v2(12.9,24.7) ; v2(15.3,25) 15.35,25 18.95,28.6 v2(19,28.6)
  Bottom Layer w0.3: v2(12.9,24.7) 12.981,24.7 13.331,25.05 15.25,25.05 v2(15.3,25) ; v2(19,28.6) 19.038,28.638 21.232,28.638 v2(21.27,28.676)
"Mot1 D": U1.13 U2.10 | length 10.8
  Top Layer w0.3: U1.13 28.44,17.79 29.7,19.05 29.7,22.2 29.9,22.4 33.85,22.4 34.425,21.825 U2.10
Mot1En1: J3.3 U8.11 | length 15.6
  Top Layer w0.3: J3.3 7.079,30.621 7.079,21.962 9.166,19.875 9.182,19.875 9.357,19.7 U8.11
Mot1En2: J3.4 U8.9 | length 18.3
  Top Layer w0.3: J3.4 4.944,34.17 7.7,31.414 7.7,22.2 8.6,21.3 U8.9
Mot1PWM: U1.14 U2.9 | length 11
  Top Layer w0.3: U1.14 28.44,19.06 29.1,19.72 29.1,22.6 29.4,22.9 34.116,22.9 34.9,22.116 34.9,22.105 34.925,22.08 U2.9@34.925,21.85
"Mot2 D": U1.11 U5.10 | length 10.1
  Top Layer w0.3: U1.11 28.44,15.25 31.25,12.44 31.25,11.3 U5.10@34.3,8.25
Mot2En1: J6.3 U8.29 | length 17.1
  Top Layer w0.3: v2(11.7,18) 12.61,17.09 15.982,17.09 17.616,18.725 17.632,18.725 17.807,18.9 U8.29
  Bottom Layer w0.3: J6.3 8.134,20.476 10.61,18 v2(11.7,18)
Mot2En2: J6.4 U8.30 | length 20
  Top Layer w0.3: v2(13.06,17.74) 13.117,17.798 13.757,17.798 13.96,18 14.47,18 16.17,19.7 U8.30
  Bottom Layer w0.3: J6.4 5.66,25.14 v2(13.06,17.74)
Mot2PWM: U1.12 U5.9 | length 11.8
  Top Layer w0.3: U1.12 28.44,16.52 31.75,13.21 31.75,11.531 33.233,10.048 33.267,10.048 34.75,8.566 34.75,8.555 34.825,8.48 U5.9
"Mot3 D": U4.13 U6.10 | length 13.8
  Top Layer w0.3: U4.13 26.91,29.946 27.937,30.973 28.825,30.973 29.8,31.948 29.8,35.979 30.571,36.75 34.1,36.75 U6.10@34.6,36.25
Mot3En1: J7.3 U8.25 | length 21.1
  Top Layer w0.3: J7.3 9.65,9.75 11.65,9.75 12,10.1 12,11 v2(13.81,12.81) ; U8.25 18.33,15.705 19.386,15.705 v2(19.39,15.71)
  Bottom Layer w0.3: v2(13.81,12.81) 14.781,12.81 15.091,12.5 15.95,12.5 16.15,12.7 16.381,12.7 v2(19.39,15.71)
Mot3En2: J7.4 U8.31 | length 19.3
  Top Layer w0.3: v2(11.3,16.9) 11.3,16.981 11.05,17.231 11.05,18.269 11.431,18.65 13.757,18.65 15.607,20.5 U8.31
  Bottom Layer w0.3: J7.4 2.239,15.891 9.253,15.891 9.947,16.586 10.904,16.586 11.219,16.9 v2(11.3,16.9)
Mot3PWM: U4.14 U6.9 | length 14.5
  Top Layer w0.3: U4.14 26.365,31.361 27.618,31.361 27.9,31.643 28.788,31.643 29.3,32.155 29.3,36.186 30.364,37.25 34.366,37.25 35.1,36.516 35.1,36.125 U6.9
NetDS1_2: DS1.2 R10.1 | length 1.5
  Top Layer w0.3: DS1.2 22.287,7.662 22.287,8.938 R10.1
NetDS2_1: DS2.1 R11.1 | length 1.3
  Top Layer w0.2: R11.1 32.95,14.875 DS2.1
NetDS3_1: DS3.1 R12.1 | length 1.4
  Top Layer w0.2: R12.1 29.275,1.7 DS3.1
NetDS4_1: DS4.1 R13.1 | length 2.9
  Top Layer w0.2: R13.1 34.125,26 DS4.1
NetJ2_1: J2.1 U2.7 | length 2.6
  Top Layer w0.5: U2.7 J2.1
NetJ5_1: J5.1 U2.5 | length 2.6
  Top Layer w0.5: J5.1@36.7,16.8 U2.5
NetJ8_1: J8.1 U5.7 | length 2.6
  Top Layer w0.5: U5.7 J8.1
NetJ9_1: J9.1 U5.5 | length 2.6
  Top Layer w0.5: J9.1@36.6,3.2 U5.5
NetJ12_1: J12.1 U6.7 | length 3.2
  Top Layer w0.5: U6.7 36.9,36.662 36.95,36.712 36.95,37.05 J12.1
NetJ13_1: J13.1 U6.5 | length 3
  Top Layer w0.5: U6.5 36.9,31.9 J13.1
NetR1_2: R1.2 U2.13 | length 2.1
  Top Layer w0.3: R1.2@32.5,19.55 R1.2 32.35,19.45 32.95,20.05 U2.13
NetR2_2: R2.2 U2.12 | length 1.8
  Top Layer w0.3: R2.2 32.35,20.95 32.75,20.55 U2.12
NetR3_1: R3.1 U2.2 | length 1.3
  Top Layer w0.3: R3.1 34.35,17.85 34.9,18.4 34.9,18.875 U2.2
NetR4_1: R4.1 U5.2 | length 2
  Top Layer w0.3: R4.1 34.316,4.4 34.8,4.884 34.8,5.275 U5.2
NetR5_2: R5.2 U5.12 | length 2.1
  Top Layer w0.3: R5.2 31.95,7.45 32.45,6.95 U5.12
NetR6_2: R6.2 U5.13 | length 2.1
  Top Layer w0.3: R6.2 31.95,6 32.4,6.45 U5.13
NetR7_1: R7.1 U6.2 | length 1.3
  Top Layer w0.3: R7.1 34.6,32.25 34.9,32.55 34.949,32.55 35.125,32.726 U6.2
NetR8_2: R8.2 U6.12 | length 2
  Top Layer w0.3: R8.2 33.2,35.4 33.65,34.95 U6.12
NetR9_2: R9.2 U6.13 | length 2.1
  Top Layer w0.3: R9.2 33.2,33.9 33.442,34.142 33.442,34.183 33.709,34.45 U6.13
nFault1: DS2.2 U2.1 | length 9.4
  Top Layer w0.2: v2(31,17.1) 31.077,17.177 31.077,17.535 32.142,18.6 32.858,18.6 33.158,18.9 U2.1 ; v2(31.4,15.8) 33.199,15.8 33.612,15.387 33.612,15.113 33.825,14.9 DS2.2
  Bottom Layer w0.2: v2(31,17.1) 31,17.051 31.4,16.651 v2(31.4,15.8)
nFault2: DS3.2 U5.1 | length 12.5
  Top Layer w0.2: DS3.2 29.3,4.326 29.6,4.626 v2(29.6,8.1) ; v2(30.9,8.1) 30.9,5.692 31.342,5.25 34.3,5.25 34.325,5.275 U5.1
  Bottom Layer w0.2: v2(29.6,8.1) v2(30.9,8.1)
nFault3: DS4.2 U6.1 | length 11.2
  Top Layer w0.2: v2(31.6,29.1) 31.6,29.987 30.583,31.004 30.583,31.783 31.8,33 32.708,33 33.008,33.3 U6.1 ; v2(32.5,27.9) 32.608,27.9 32.783,27.725 34,27.725 DS4.2
  Bottom Layer w0.2: v2(31.6,29.1) 31.6,29.097 32.023,28.674 32.023,28.377 v2(32.5,27.9)
NRST: C25.1 J4.10 U8.4 | length 14.1
  Top Layer w0.3: v2(12.1,20.8) 13.109,20.8 14.325,22.016 14.325,22.032 14.5,22.207 U8.4 ; v2(12.4,26.9) C25.1 12.4,29.857 12.703,30.16 J4.10
  Bottom Layer w0.3: v2(12.1,20.8) 12.1,24.819 12.4,25.119 v2(12.4,26.9)
nSLEEP: U2.3 U4.11 U5.3 U6.3 | length 55.5
  Top Layer w0.2: U4.11 26.223,27.403 28.697,27.403 v1(28.7,27.4) 31.108,27.4 35.625,31.917 U6.3 ; v1(29.4,13) 30.3,12.1 30.3,1.817 30.417,1.7 33.708,1.7 35.325,3.317 U5.3 ; v1(31,14.9) 30.391,15.509 30.391,15.709 v2(29.7,16.4) 34.258,16.4 35.425,17.567 U2.3
  Bottom Layer w0.2: v1(28.7,27.4) 28.7,17.4 v2(29.7,16.4) ; v1(29.4,13) 31,14.6 v1(31,14.9)
PGND: C2.1 C3.1 C4.1 C5.1 C9.1 C10.1 C11.1 C12.1 C13.1 C14.1 C15.1 C16.1 C17.1 C21.1 C24.2 C26.1 J1.1 J10.1 R1.1 R2.1 R3.2 R4.2 R5.1 R6.1 R7.2 R8.1 R9.1 U1.9 U1.15 U2.6 U2.8 U2.11 U2.14 U4.9 U4.15 U5.6 U5.8 U5.11 U5.14 U6.6 U6.8 U6.11 U6.14 U9.4 U10.2 | length 32.8
  Top Layer w0.2: 34.524,6.84 34.591,6.84 34.739,6.988 34.839,6.988 35.325,7.474 U5.8 ; 34.623,20.663 34.691,20.663 34.876,20.848 34.893,20.848 35.4,21.355 35.4,21.675 U2.8 ; 34.823,34.837 34.93,34.73 35.625,35.425 U6.8
  Top Layer w0.3: v1(27.735,20.315) U1.15 ; v1(30.6,35.4) 30.6,35.45 31.4,36.25 33.175,36.25 33.975,35.45 U6.11 34.491,35.45 34.871,35.069 34.871,34.729 ; v1(30.65,21) 30.65,21.05 31.45,21.85 32.975,21.85 33.775,21.05 U2.11 34.291,21.05 34.595,20.746 34.595,20.692 34.623,20.663 34.6,20.64 34.6,19.859 34.291,19.55 U2.14 ; v1(31.9,9.15) 31.95,9.15 33.625,7.475 33.775,7.475 U5.11 34.191,7.45 34.6,7.041 34.6,6.819 34.45,6.669 34.45,6.209 34.191,5.95 U5.14 ; U6.14 34.491,33.95 34.795,34.254 34.795,34.767 34.852,34.767 ; U9.4 J10.1@37.805,43.405 ; J10.1@37.805,42.905 v1(38.2,43.3)
  Bottom Layer w0.6: C13.1 C17.1 ; C14.1 C5.1 ; C11.1 C9.1
  other v1: 33.4,2.7 31.9,4.3 26.2,4.9 28.6,4.9 37.3,5.3 38.2,5.3 37.3,6.7 38.2,6.7 37.3,8.1 38.2,8.1 28.545,8.7 27.75,12.71 32.65,17.8 37.4,18.9 38.3,18.9 30.65,19.4 37.4,20.3 38.3,20.3 37.4,21.8 38.3,21.8 26.4,23 26.22,24.866 28.475,32.4 32.534,32.391 26.22,32.486 37.6,33.3 38.4,33.3 30.6,33.9 37.6,34.7 38.4,34.7 37.6,36.1 38.4,36.1 37.2,41.3 38.2,41.3 39.2,41.3 37.2,42.3 38.2,42.3 39.2,42.3 37.2,43.3 39.2,43.3
SWCLOCK: J4.4 U8.24 | length 22.9
  Top Layer w0.3: J4.4 13.747,33.985 16.885,33.985 v2(16.9,34) ; U8.24 v2(16.9,16.3)
  Bottom Layer w0.3: v2(16.9,16.3) v2(16.9,34)
SWDIO: J4.2 U8.23 | length 23.3
  Top Layer w0.3: J4.2 13.777,35.195 16.055,35.195 v2(16.1,35.15) ; U8.23 v2(16.1,15.9)
  Bottom Layer w0.3: v2(16.1,15.9) v2(16.1,35.15)
ThwPWM: J1.2 U4.12 | length 22.6
  Top Layer w0.3: U4.12 26.232,28.688 29.088,28.688 v2(29.1,28.7)
  Bottom Layer w0.3: J1.2 28.9,38.413 29.1,38.213 v2(29.1,28.7)
USB_DATA_N: J16.2 U7.4 U8.21 | length 11.2
  Top Layer w0.26: U7.4 U7.4@13.719,7.85 ; J16.2 14.22,4.27 14.22,4.872 14.245,4.897 14.245,5.973 14.27,5.998 14.27,7.299 13.839,7.73 13.725,7.73 13.719,7.736 U7.4@13.719,7.85 ; U8.21 14.447,14.222 14.447,13.458 14.44,13.45 14.44,11.362 14.27,11.192 14.27,8.401 13.839,7.97 13.725,7.97 13.719,7.964 U7.4@13.719,7.85
USB_DATA_P: J16.3 U7.3 U8.22 | length 11.2
  Top Layer w0.26: J16.3 14.73,4.27 14.73,4.872 14.705,4.897 14.705,5.783 14.73,5.807 14.73,7.33 U7.3@15.25,7.85 ; U8.22 15.3,13.747 14.907,13.353 14.907,13.267 14.9,13.26 14.9,11.171 14.73,11.002 14.73,8.37 U7.3@15.25,7.85 ; U7.3 U7.3@15.25,7.85
pads on no net: J1.3 J1.4 J1.drill J3.drill J4.6 J4.7 J4.8 J6.drill J7.drill J16.4 R1.0 R2.0 R3.0 R4.0 R5.0 R6.0 R7.0 R8.0 R9.0 R10.0 R11.0 R12.0 R13.0 U1.7 U1.10 U4.7 U4.10 U7.1 U8.2 U8.3 U8.5 U8.8 U8.10 U8.13 U10.4
copper on no net:
  other v3: 3,47 37,47

## Polygon pours and split planes (outlines as drawn)
PGND on Int1 (GND) "PGND_L02_P001" (solid, remove dead copper, pour order 1): 40,50 25.1,50 25.1,0 40,0
GND on Int1 (GND) "GND_L02_P000" (solid, remove dead copper, pour order 0): 0,50 24,50 24,0 0,0
+16 on Bottom Layer "+16_L04_P003" (solid, remove dead copper, pour order 3): 36.8,43.9 36.8,0.5 28.1,0.5 28.1,6.9 33,6.9 33,43.9
PGND on Bottom Layer "PGND_L04_P002" (solid, remove dead copper, pour order 2): 37,37.1 37,37.2 40,37.2 40,0 37,0
PGND on Int2 (PWR) "PGND_L03_P005" (solid, pour order 5): 25.1,50 40,50 40,0 25.1,0
GND on Int2 (PWR) "GND_L03_P004" (solid, pour order 4): 0,50 24,50 24,0 0,0
BAT+ on Top Layer "BAT+_L01_P006" (solid, remove dead copper, pour order 6): 34.1,44 34.1,38.3 25.4,38.3 25.4,44

## Silkscreen, mask and mechanical layers (free items; w line width, h text height)
Top Overlay:
  drawing of 10 lines, arcs and shapes, not listed
  text "Robothree" at 6.354,45.954 h2
  text "NF2" at 35.154,28.146 h1 r270
  text "NF1" at 35.754,13.754 h1
  text "DB_LED" at 17.754,5.521 h1
  text "NF3" at 30.946,4.354 h1 r90
Mechanical 1:
  the board outline again, w0.15

## Text inside footprints (layer, text, board x,y; h text height)
J4: Top 3D Body "J1" at 11.256,33.135 h0.64 r270
J16: Mechanical 13 "PCB END" at 19.55,0.225 h0.41